# Altium PCB I2C_Shield.PcbDoc (part 1 of 2)
Units mm, origin at the board's own origin, x right, y up, seen from the top; angles counter-clockwise.
Board outline 57.58 x 53.85 mm, 2 copper layers (Top Layer, Bottom Layer); 35 components, 41 nets, 124 pads, 57 vias.
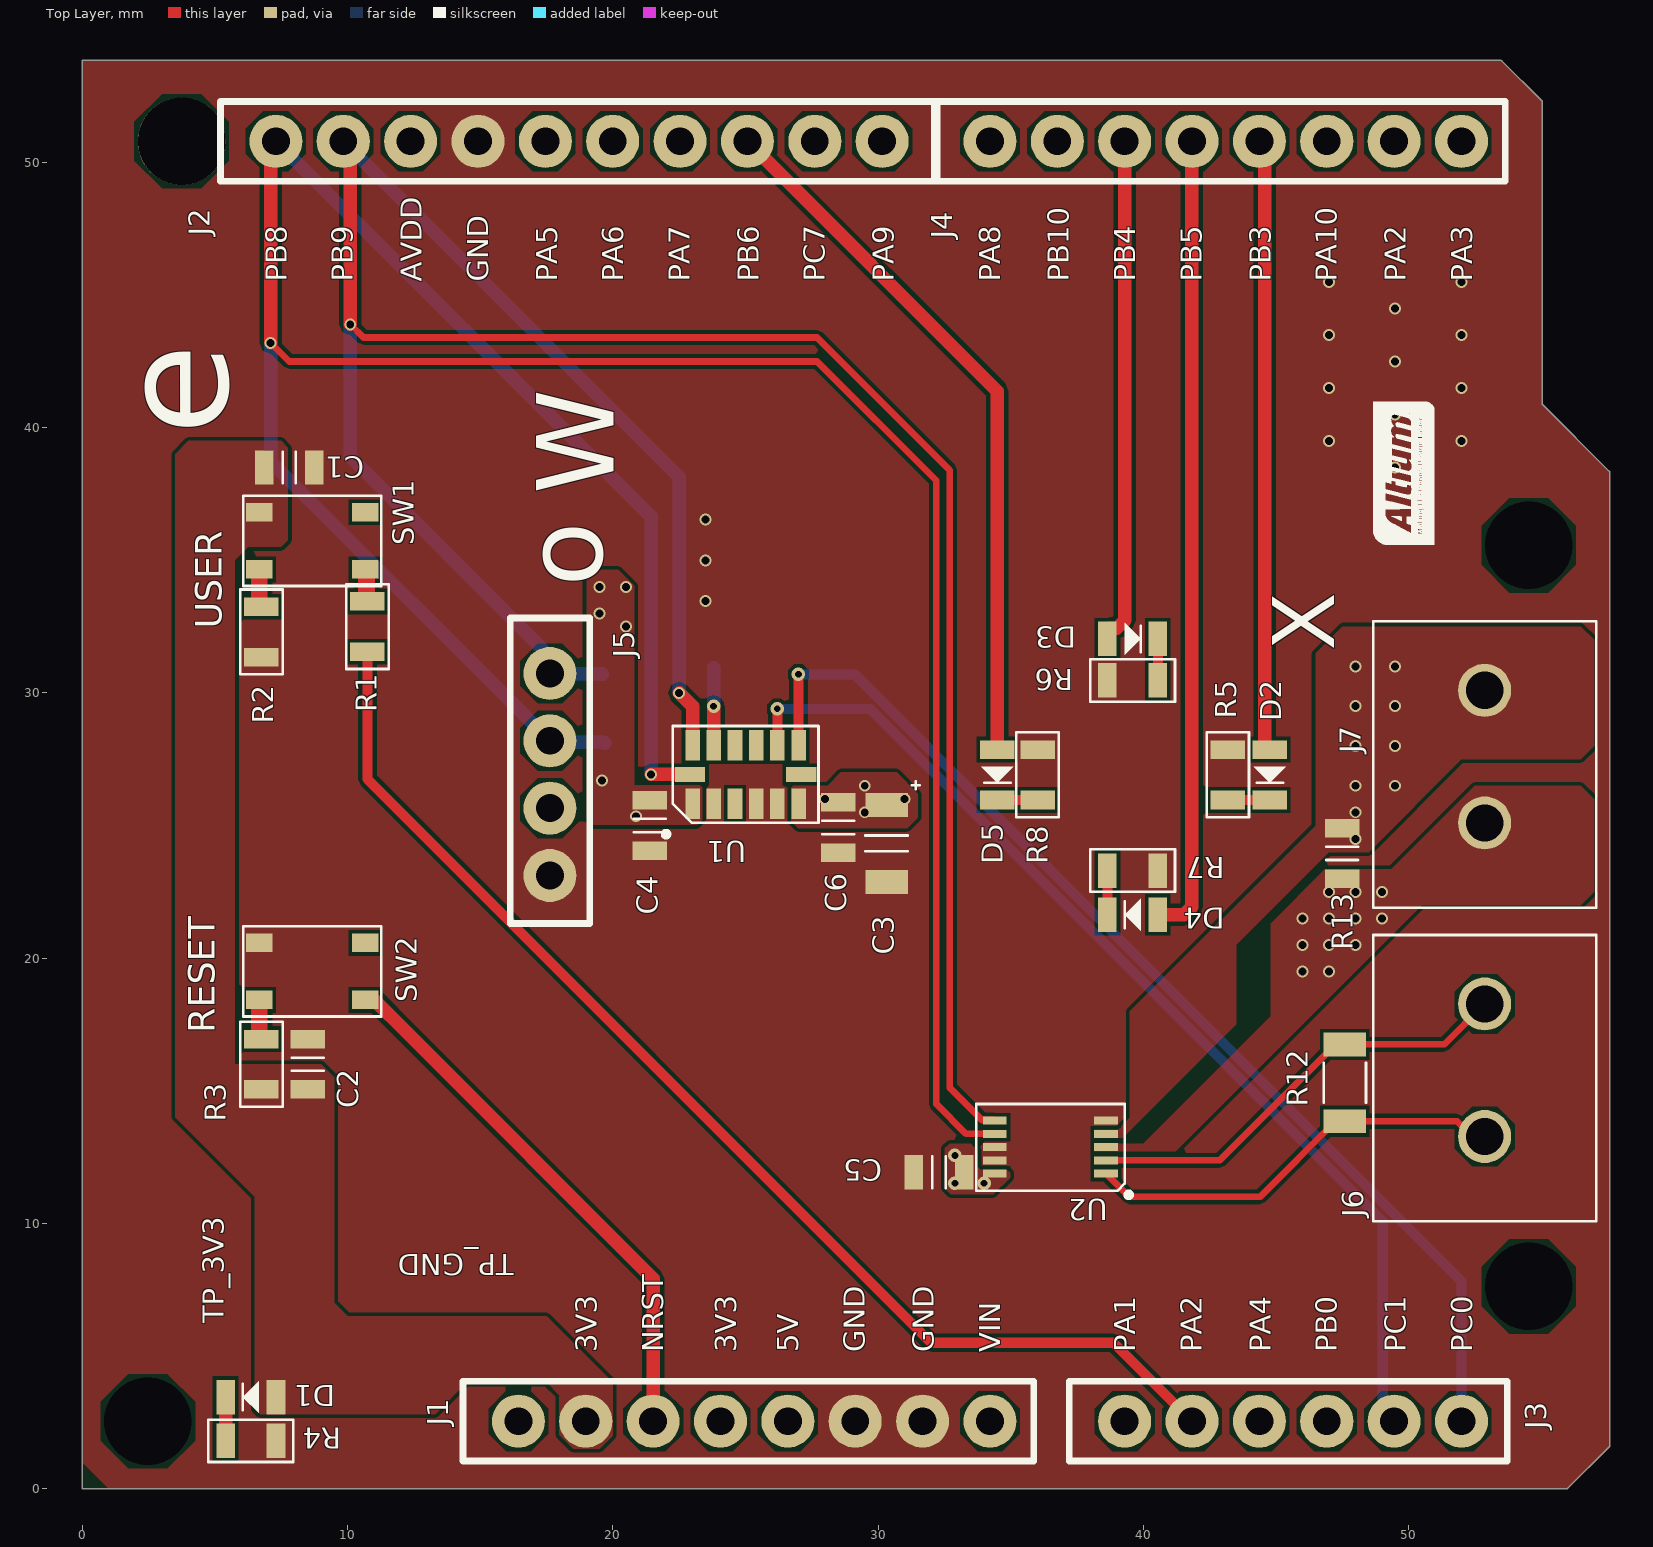
[diagram p0: Top Layer view]
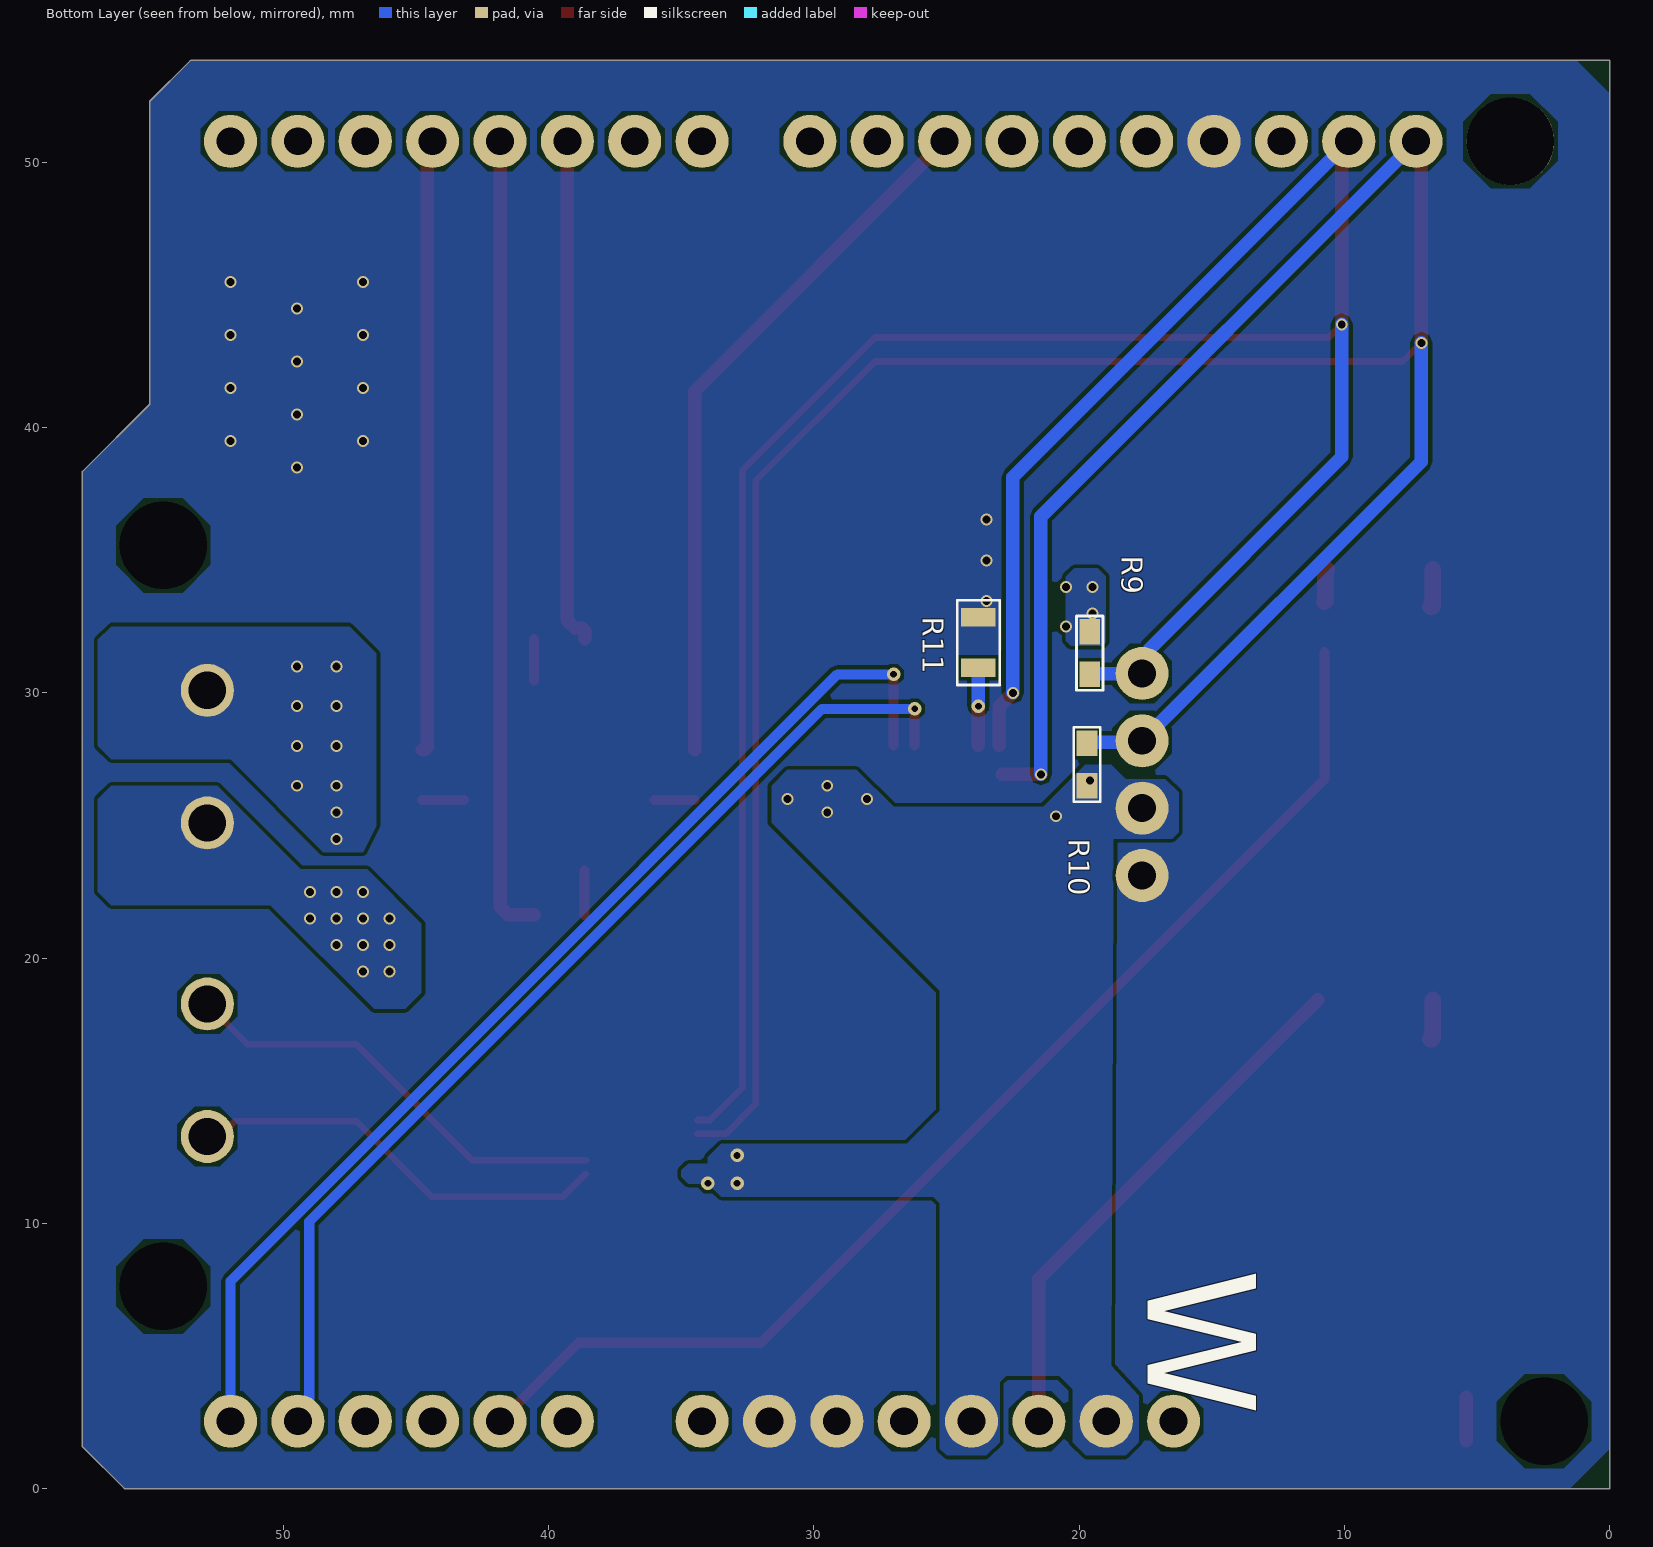
[diagram p1: Bottom Layer view, seen from below]
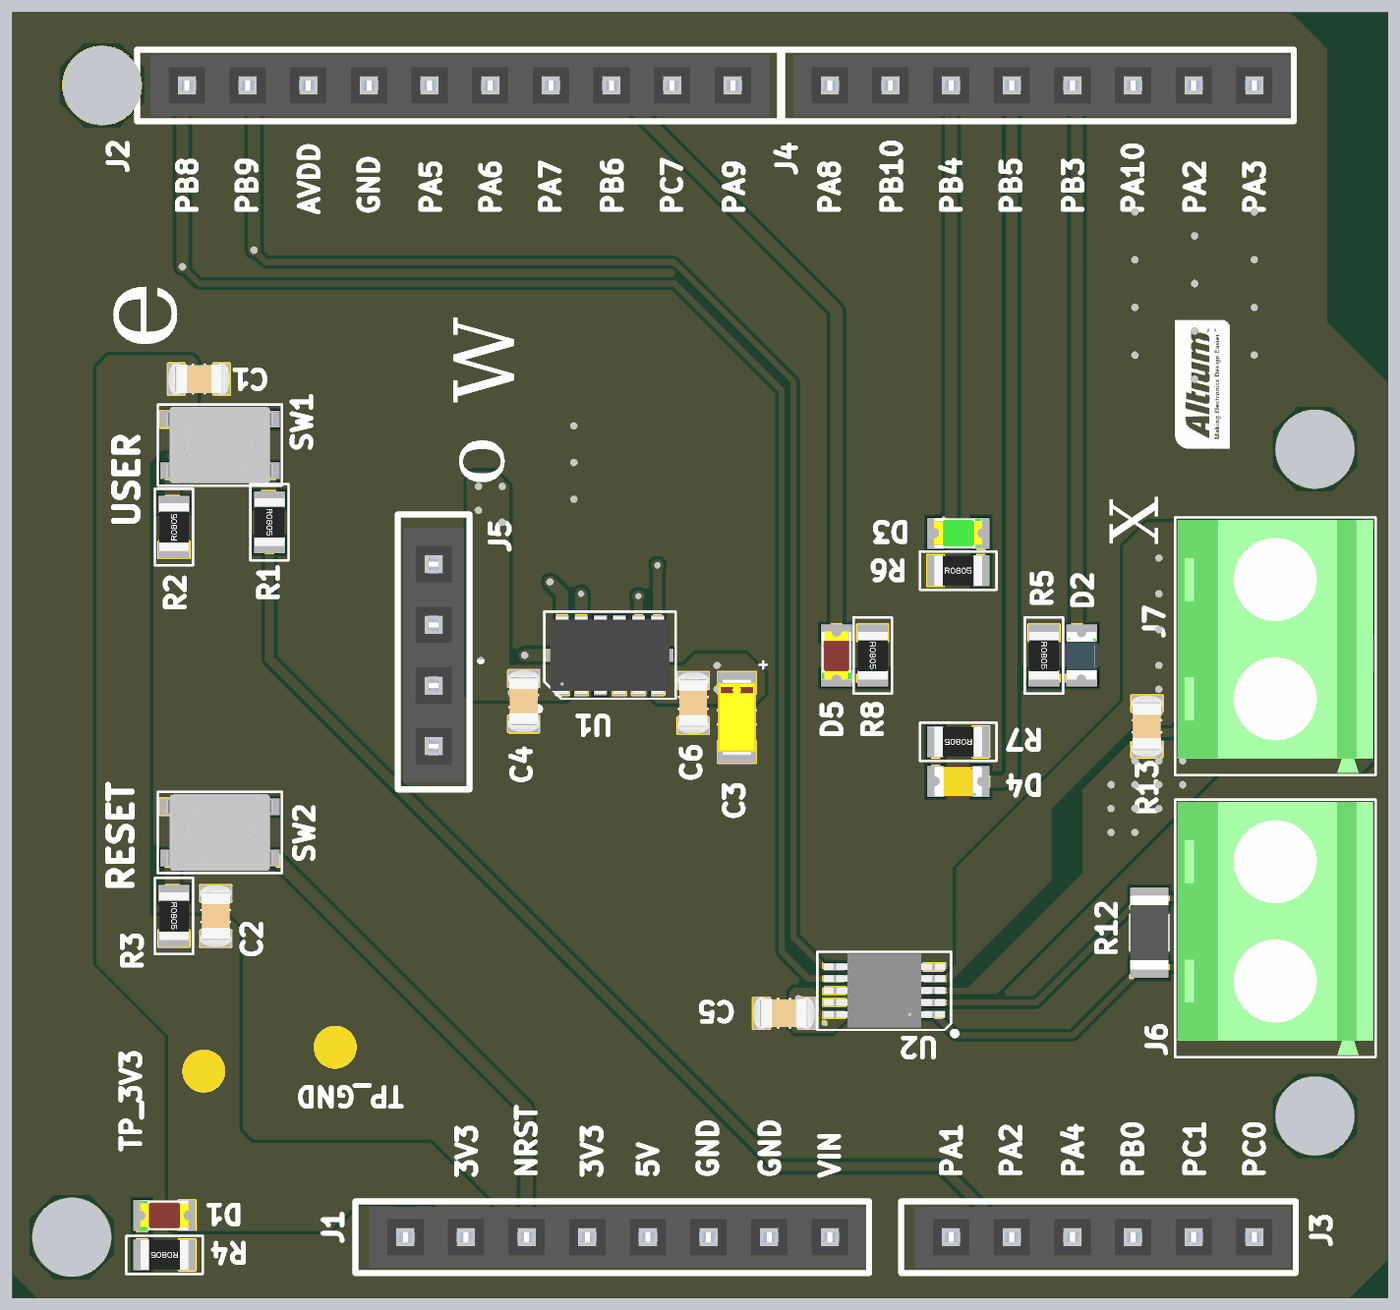
[diagram p2: 3D render of the assembled board from above, using the file's embedded part models]
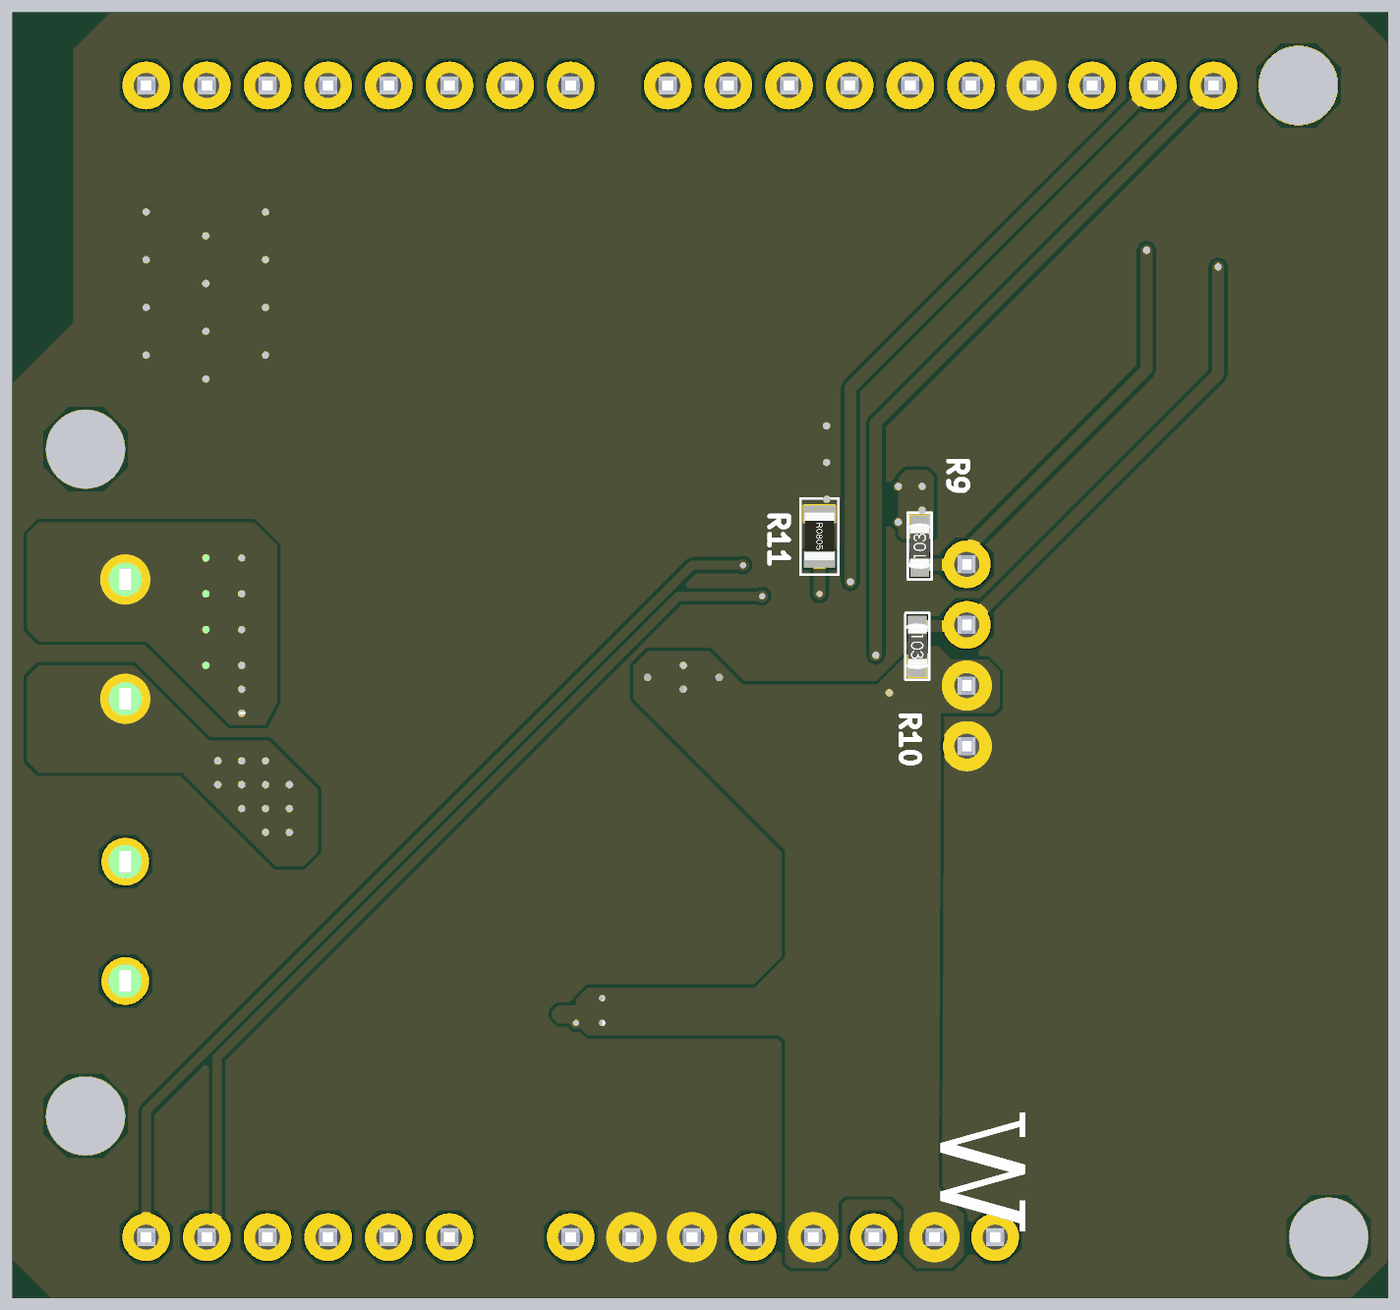
[diagram p3: 3D render of the assembled board from below, using the file's embedded part models]

## Layer stack, top to bottom
Top Solder: solder mask 0.0102, Solder Resist, Dk 3.5
Top Layer: signal copper 0.0356
Dielectric 1: dielectric 0.32, FR-4, Dk 4.8
Bottom Layer: signal copper 0.0356
Bottom Solder: solder mask 0.0102, Solder Resist, Dk 3.5

## Board outline
0,0 0,53.851 53.508,53.851 53.515,53.843 53.508,53.851 55.046,52.312 55.046,40.886 57.581,38.351 57.581,1.58 56.001,0

## Design rules (kind name [scope] priority, off if disabled: settings)
Clearance [All] p1: gap=0.127 ignorepadtopadclearanceinfootprint=FALSE except(0: Arc-Hole Track-Hole SMDPad-Hole THPad-Hole Via-Hole Fill-Hole Poly-Hole Region-Hole Text-Hole)
ComponentClearance [All] p1: gap=0.254 collisioncheckmode=3 verticalgap=-2.54 showdistances=FALSE
Height [All] p1: minheight=0 maxheight=100 prefheight=12.7
HoleSize [All] p1: absolutevalues=TRUE maxlimit=6.3 minlimit=0.2 maxpercent=80.000 minpercent=20.000
HoleToHoleClearance [All] p1: gap=0.6 allowstackedmicrovias=TRUE
MinimumSolderMaskSliver MinimumSolderMaskSliver_1 [All] p1: minsoldermaskwidth=0.095
MinimumSolderMaskSliver [All] p2: minsoldermaskwidth=0.1
PolygonConnect [All] p1: connectstyle=Relief reliefconductorwidth=0.254 reliefentries=4 polygonreliefangle="90 Angle" airgapwidth=0.254
RoutingVias [All] p1: holewidth=0.4 width=0.6 viastyle="Through Hole" minholewidth=0.2 minwidth=0.3 maxholewidth=6.2 maxwidth=6.3
SilkToSilkClearance [All] p1: silktosilkclearance=0.15
SilkToSolderMaskClearance [IsPad] p1: minsilkscreentomaskgap=0.15 clearancetoexposedcopper=TRUE
SolderMaskExpansion [All] p1: expansion=0.1 istentingtop=FALSE
Width [All] p1: maxlimit=1.27 minlimit=0.254 preferedwidth=0.508
23 further rules are at their usual default settings.

## Classes and differential pairs
component class Power_Management: C1 C2 C3 C4 C5 C6 D1 D2 D3 D4 D5 J5 J6 J7 R1 R2 R3 R4 R5 R6 R7 R8 R9 R10 R11 R12 R13 SW1 SW2 U1 U2
component class Controllers: J1 J2 J3 J4

## Components (designator, comment, footprint, x,y, rotation, side; value= is the part's Value field where it differs from the comment)
C1 "CL21B104KBCNNNC" CAP_0805 7.8,38.5 r180 top
C2 "CL21B104KBCNNNC" CAP_0805 8.5,16 r270 top
C3 "T491A106K010AT" CAP_1206_TANT 30.325,24.325 r270 top
C4 "CL21B104KBCNNNC" CAP_0805 21.4,25 r90 top
C5 "CL21B104KBCNNNC" CAP_0805 32.3,11.925 r0 top
C6 "CL21B104KBCNNNC" CAP_0805 28.5,24.926 r90 top
D1 "LH R974-LP-1" LED_RED_0805 6.35,3.45 r0 top
D2 "150080BS75000" LED_BLUE_0805 44.775,26.913 r90 top
D3 "LTST-C171GKT" LED_GREEN_0805 39.6,32.038 r180 top
D4 "LTST-C170KFKT" LED_ORANGE_0805 39.6,21.638 r0 top
D5 "LH R974-LP-1" LED_RED_0805 34.5,26.913 r90 top
J1 "PPTC081LFBN-RC" "8x1 Female Header 2.54mm" 25.33,2.54 r0 top locked
J2 "PPTC101LFBN-RC" "10x1 Female Header 2.54mm" 18.726,50.8 r0 top
J3 "PPTC061LFBN-RC" "6x1 Female Header 2.54mm" 45.65,2.54 r0 top
J4 "PPTC081LFBN-RC" "8x1 Female Header 2.54mm" 43.11,50.8 r0 top
J5 "PPTC041LFBN-RC" "4x1 Female Header 2.54mm" 17.627,26.925 r270 top
J6 "282836-2" TERMINAL 52.875,15.775 r270 top
J7 "282836-2" TERMINAL 52.875,27.6 r270 top
R1 "RC0805FR-07470RL" RES_0805 10.75,32.5 r270 top
R2 "RC0805JR-0710KL" RES_0805 6.75,32.3 r90 top
R3 "RC0805JR-0710KL" RES_0805 6.75,16 r270 top
R4 "RC0805FR-07470RL" RES_0805 6.35,1.8 r180 top
R5 "RC0805FR-07470RL" RES_0805 43.189,26.913 r270 top
R6 "RC0805FR-07470RL" RES_0805 39.6,30.47 r0 top
R7 "RC0805FR-07470RL" RES_0805 39.6,23.3 r180 top
R8 "RC0805FR-07470RL" RES_0805 36.017,26.913 r270 top
R9 "RC0603JR-074K7L" RES_0603 19.6,31.5 r90 bottom
R10 "RC0603JR-074K7L" RES_0603 19.7,27.3 r270 bottom
R11 "RC0805JR-0710KL" RES_0805 23.8,31.9 r270 bottom
R12 "RL1206FR-070R01L" RES_1206 47.6,15.3 r270 top
R13 "CC0805KRX7R9BB471" CAP_0805 47.5,23.95 r270 top
SW1 "PTS815 SJK 250 SMTR LFS" "BUTTON SMD" 8.671,35.734 r180 top locked
SW2 "PTS815 SJK 250 SMTR LFS" "BUTTON SMD" 8.671,19.5 r180 top locked
U1 "ADXL345BCCZ" 14-VFLGA 25.007,26.925 r90 top
U2 "LTC2990IMS#TRPBF" MSOP-10 36.5,12.875 r90 top

## Footprints (in the part's own frame and the unit in brackets; to place one, negate y for a bottom-side part, rotate by r counter-clockwise, add the part's x,y. Pads: shape width x height; smd on the part's side, far side on the other; paste and mask are expansions set on the pad)
"4x1 Female Header 2.54mm" [mm]
  round 2 hole 1.05 mask+0.05: 1(-3.81,0) 2(-1.27,0) 3(1.27,0) 4(3.81,0)
  silkscreen extent -5.9,-1.5 5.62,1.5, body extent -5.33,-1.27 5.33,1.27, height 8.51
"6x1 Female Header 2.54mm" [mm]
  round 2 hole 1.05 mask+0.05: 1(-6.35,0) 2(-3.81,0) 3(-1.27,0) 4(1.27,0) 5(3.81,0) 6(6.35,0)
  silkscreen extent -8.44,-1.5 8.08,1.5, body extent -7.87,-1.27 7.87,1.27, height 8.51
"8x1 Female Header 2.54mm" [mm]
  round 2 hole 1.05 mask+0.05: 1(-8.89,0) 2(-6.35,0) 3(-3.81,0) 4(-1.27,0) 5(1.27,0) 6(3.81,0) 7(6.35,0) 8(8.89,0)
  silkscreen extent -10.98,-1.5 10.54,1.5, body extent -10.41,-1.27 10.41,1.27, height 8.51
"10x1 Female Header 2.54mm" [mm] "Through Hole"
  round 2 hole 1.05 mask+0.05: 1(-11.43,0) 2(-8.89,0) 3(-6.35,0) 4(-3.81,0) 5(-1.27,0) 6(1.27,0) 7(3.81,0) 8(6.35,0) 9(8.89,0) 10(11.43,0)
  silkscreen extent -13.52,-1.5 13.5,1.5, body extent -12.95,-1.27 12.95,1.27, height 8.51
14-VFLGA [mm] "Surface Mount"
  rect 1.145x0.55 smd mask+0.05: 1(-1.097,2) 2(-1.097,1.2) 3(-1.097,0.4) 4(-1.097,-0.4) 5(-1.097,-1.2) 6(-1.097,-2) 8(1.098,-2) 9(1.098,-1.2) 10(1.098,-0.4) 11(1.098,0.4) 12(1.098,1.2) 13(1.098,2)
  rect 0.55x1.145 smd mask+0.05: 7(0,-2.097) 14(0,2.097)
  silkscreen extent -2.35,-2.75 1.83,3.1, body extent -1.63,-2.5 1.63,2.5, height 1.02
"BUTTON SMD" [mm] "4.2mm x 3.2mm"
  rect 1x0.7 smd mask+0.05: 1(-2,1.075) 2(2,1.075) 4(2,-1.075) ""(-2,-1.075)
  silkscreen extent -2.6,-1.7 2.6,1.7, body extent -2.25,-1.6 2.25,1.6
CAP_0805 [mm]
  rect 0.7x1.3 smd mask+0.05: 1(-0.95,0) 2(0.95,0)
  silkscreen extent -0.25,-0.6 0.25,0.6, body extent -1.3,-0.68 1.3,0.68, height 0.9
CAP_1206_TANT [mm]
  rect 0.9x1.6 smd mask+0.05: 1(-1.45,0) 2(1.45,0)
  silkscreen extent -2.35,-0.8 0.3,1.25, body extent -1.6,-0.8 1.6,0.8, height 1.8
LED_BLUE_0805 [mm]
  rect 0.7x1.3 smd mask+0.05: 1(-0.95,0) 2(0.95,0)
  silkscreen extent -0.3,-0.6 0.3,0.6, body extent -1.02,-0.62 0.98,0.64, height 0.8
LED_GREEN_0805 [mm]
  rect 0.7x1.3 smd mask+0.05: 1(-0.95,0) 2(0.95,0)
  silkscreen extent -0.3,-0.6 0.3,0.6, body extent -1.01,-0.63 1.01,0.62, height 1.1
LED_ORANGE_0805 [mm]
  rect 0.7x1.3 smd mask+0.05: 1(-0.95,0) 2(0.95,0)
  silkscreen extent -0.3,-0.6 0.3,0.6, body extent -1,-0.63 1,0.63, height 0.8
LED_RED_0805 [mm]
  rect 0.7x1.3 smd mask+0.05: 1(-0.95,0) 2(0.95,0)
  silkscreen extent -0.3,-0.6 0.3,0.6, body extent -1.01,-0.63 1.01,0.62, height 1.1
MSOP-10 [mm]
  rect 0.305x0.9 smd mask+0.05: 1(-1,-2.1) 2(-0.5,-2.1) 3(0,-2.1) 4(0.5,-2.1) 5(1,-2.1) 6(1,2.1) 7(0.5,2.1) 8(0,2.1) 9(-0.5,2.1) 10(-1,2.1)
  silkscreen extent -1.9,-3.05 1.63,2.8, body extent -1.55,-2.53 1.55,2.53, height 1.09
RES_0603 [mil]
  rect 38x31 smd mask+1.97: 1(-31.5,0) 2(31.5,0)
  silkscreen extent -55,-20 55,20, body extent -39,-19 39,20, height 17
RES_0805 [mm]
  rect 0.7x1.3 smd mask+0.05: 1(-0.95,0) 2(0.95,0)
  silkscreen extent -1.6,-0.8 1.6,0.8, body extent -1,-0.63 1,0.63, height 0.6
RES_1206 [mm]
  rect 0.9x1.6 smd mask+0.05: 1(-1.45,0) 2(1.45,0)
  silkscreen extent -0.75,-0.8 0.75,0.8, body extent -1.55,-0.8 1.55,0.8, height 0.65
TERMINAL [mm] "5MM"
  round 2 hole 1.4 mask+0.05: 1(-2.5,0) 2(2.5,0)
  silkscreen extent -5.1,-4.2 5.7,4.2, body extent -5,-4.1 5.6,4.1, height 10

## Part data
C1 C2 C4 C5 C6: library part "CAP CER 100nF 0805", "CAP CER 100nF %10 0805", Capacitance=100nF, Case Code (Metric)=2012, Case Code (Imperial)=0805, Dielectric=X7R, Manufacturer=Samsung, Max Operating Temperature=125°C, Min Operating Temperature=-55°C, Supplier Part Number 1=1276-1003-1-ND, Tolerance=10%, Voltage=50V, Case/Package=0805, Category="Ceramic Capacitors", ComponentLink1Description=https://datasheet.ciiva.com/25710/cl21b104kbcnnnc-25710182.pdf?src-supplier=Digi-Key, ComponentLink1URL=https://datasheet.ciiva.com/25710/cl21b104kbcnnnc-25710182.pdf?src-supplier=Digi-Key, ComponentLink2Description=https://datasheet.ciiva.com/29199/454152-da-01-en-vs-kondensator-0805-29199814.pdf?src-supplier=Conrad, ComponentLink2URL=https://datasheet.ciiva.com/29199/454152-da-01-en-vs-kondensator-0805-29199814.pdf?src-supplier=Conrad, Construction=Flat, Contact Plating=Tin, Depth=1.25mm, Designed by=BERK, Height=0.85mm, Lead Free="Lead Free", Length=2mm, Manufacturer Part Number=CL21B104KBCNNNC, Material=Ceramic, Mount="Surface Mount", Packaging="Tape and Reel", Pricing 1="1=0,10000, 10=0,04700, 50=0,02560, 100=0,02090, 500=0,01494, 1000=0,01174 (USD)", Radiation Hardening=No, RoHS=Yes, RoHS Compliant=Yes, Series=CL, Stock 1=3371502, Supplier 1=Digi-Key, Thickness=0.037inch, Voltage Rating=50V, Voltage Rating (DC)=50V, Width=0.049inch
C3: library part "CAP TANT 10uF 1206", "Cap Tant Solid 10uF 10V A CASE 10% (3.2 X 1.6 X 1.6mm) SMD 3216-18 4 Ohm 125 C T/R", Capacitance=10uF, Case Code (Metric)=3216, Case Code (Imperial)=1206, Dielectric Material=Tantalum, ESR (Equivalent Series Resistance)=4R, Leakage Current=1uA, Manufacturer=KEMET, Max Operating Temperature=125°C, Min Operating Temperature=-55°C, Package Quantity=1, Ripple Current=137mA, Supplier Part Number 1=399-3684-1-ND, Tolerance=10%, Voltage=10V, Case/Package=1206, Category="Tantalum Capacitors", ComponentLink1Description=https://datasheet.ciiva.com/7668/1732743-7668006.pdf?src-supplier=Element14, ComponentLink1URL=https://datasheet.ciiva.com/7668/1732743-7668006.pdf?src-supplier=Element14, ComponentLink2Description=https://datasheet.ciiva.com/27052/1573249-27052559.pdf?src-supplier=Jameco, ComponentLink2URL=https://datasheet.ciiva.com/27052/1573249-27052559.pdf?src-supplier=Jameco, ComponentLink3Description=https://datasheet.ciiva.com/257/kem-t2005-t491-257584.pdf?src-supplier=Digikey, ComponentLink3URL=https://datasheet.ciiva.com/257/kem-t2005-t491-257584.pdf?src-supplier=Digikey, ComponentLink4Description=https://datasheet.ciiva.com/11793/0900766b80718482-11793106.pdf?src-supplier=Rs, ComponentLink4URL=https://datasheet.ciiva.com/11793/0900766b80718482-11793106.pdf?src-supplier=Rs, ComponentLink5Description=https://datasheet.ciiva.com/7668/kem-t2005-t491-7668139.pdf?src-supplier=Element14, ComponentLink5URL=https://datasheet.ciiva.com/7668/kem-t2005-t491-7668139.pdf?src-supplier=Element14, ComponentLink6Description=https://datasheet.ciiva.com/7668/1854511-7668007.pdf?src-supplier=Element14, ComponentLink6URL=https://datasheet.ciiva.com/7668/1854511-7668007.pdf?src-supplier=Element14, ComponentLink7Description=https://datasheet.ciiva.com/7668/1446014-7668008.pdf?src-supplier=Element14, ComponentLink7URL=https://datasheet.ciiva.com/7668/1446014-7668008.pdf?src-supplier=Element14, ComponentLink8Description=https://datasheet.ciiva.com/7668/1854511-7668005.pdf?src-supplier=Element14, ComponentLink8URL=https://datasheet.ciiva.com/7668/1854511-7668005.pdf?src-supplier=Element14, ComponentLink9Description=https://datasheet.ciiva.com/257/kem-t2005-t491-257585.pdf?src-supplier=Digikey, ComponentLink9URL=https://datasheet.ciiva.com/257/kem-t2005-t491-257585.pdf?src-supplier=Digikey, ComponentLink10Description=https://datasheet.ciiva.com/257/kem-t2005-t491-257586.pdf?src-supplier=Digikey, ComponentLink10URL=https://datasheet.ciiva.com/257/kem-t2005-t491-257586.pdf?src-supplier=Digikey, ComponentLink11Description=https://datasheet.ciiva.com/14586/70095774-14586699.pdf?src-supplier=Allied+Electronics, ComponentLink11URL=https://datasheet.ciiva.com/14586/70095774-14586699.pdf?src-supplier=Allied+Electronics, ComponentLink12Description=https://datasheet.ciiva.com/14596/70095774-14596972.pdf?src-supplier=Allied+Electronics, ComponentLink12URL=https://datasheet.ciiva.com/14596/70095774-14596972.pdf?src-supplier=Allied+Electronics, ComponentLink13Description=https://datasheet.ciiva.com/12882/kem-t2005-t491-12882826.pdf?src-supplier=Mouser, ComponentLink13URL=https://datasheet.ciiva.com/12882/kem-t2005-t491-12882826.pdf?src-supplier=Mouser, ComponentLink14Description=https://datasheet.ciiva.com/29244/458293-da-01-en-kondensator-10uf-3216-10pr-10v-85c-29244583.pdf?src-supplier=Conrad, ComponentLink14URL=https://datasheet.ciiva.com/29244/458293-da-01-en-kondensator-10uf-3216-10pr-10v-85c-29244583.pdf?src-supplier=Conrad, Construction=Flat, Depth=1.6mm, Designed by="Aslı Kurt", Dissipation Factor=6%, Features="General Purpose", Height=1.6mm, Height - Seated (Max)=0.071inch, Lead Free=5697LeadFree, Length=3.2mm, Manufacturer Part Number=T491A106K010AT, Mount="Surface Mount,PCB", Packaging="Tape and Reel", Polarity=Polar, Pricing 1="1=0,32, 10=0,209, 50=0,154, 100=0,1255, 500=0,09904, 1000=0,08364 (USD)", Reach SVHC Compliant=No, RoHS=Yes, RoHS Compliant=Yes, Series=T491, Size=1.6mm, Stock 1=1419669, Supplier 1=Digikey, Termination=SMD/SMT, Voltage Rating=10V, Voltage Rating (DC)=10V, Width=0.063inch
D1 D5: library part "LED RED 0805", "LED Uni-Color Hyper Red 660nm 2-Pin Chip 0805(2012Metric) T/R", Case Code (Metric)=2012, Case Code (Imperial)=0805, Color=Red, Forward Current=30mA, Forward Voltage=1.8V, Lens Color=White, Manufacturer="Osram Opto", Max Operating Temperature=85°C, Min Operating Temperature=-30°C, Package Quantity=1, Reverse Voltage=5V, Supplier Part Number 1=475-1415-1-ND, Test Current=20mA, Case/Package=0805, Category=LEDs, ComponentLink1Description=http://www.jameco.com/Jameco/Products/ProdDS/2085634.pdf?src-supplier=Jameco, ComponentLink1URL=http://www.jameco.com/Jameco/Products/ProdDS/2085634.pdf?src-supplier=Jameco, ComponentLink2Description=http://components.arrow.com/part/dataview/0323_01825492?src-supplier=Arrow+Europe, ComponentLink2URL=http://components.arrow.com/part/dataview/0323_01825492?src-supplier=Arrow+Europe, ComponentLink3Description=https://dammedia.osram.info/media/resource/hires/osram-dam-2493888/LH%20R974.pdf?src-supplier=Digi-Key, ComponentLink3URL=https://dammedia.osram.info/media/resource/hires/osram-dam-2493888/LH%20R974.pdf?src-supplier=Digi-Key, ComponentLink4Description=http://www.mouser.com/ds/2/311/LH%20R974%20-%20CHIPLED%200805-318659.pdf?src-supplier=Mouser, ComponentLink4URL=http://www.mouser.com/ds/2/311/LH%20R974%20-%20CHIPLED%200805-318659.pdf?src-supplier=Mouser, ComponentLink5Description=https://www.verical.com/server-webapp/html/getDatasheet?partID=258950&src-supplier=Verical, ComponentLink5URL=https://www.verical.com/server-webapp/html/getDatasheet?partID=258950&src-supplier=Verical, ComponentLink6Description=http://components.arrow.com/part/dataview/41971690S1077610N9133?src-supplier=Arrow+Electronics, ComponentLink6URL=http://components.arrow.com/part/dataview/41971690S1077610N9133?src-supplier=Arrow+Electronics, ComponentLink7Description=http://components.arrow.com/part/dataview/41971690S6190115N2128?src-supplier=Arrow+Electronics, ComponentLink7URL=http://components.arrow.com/part/dataview/41971690S6190115N2128?src-supplier=Arrow+Electronics, Depth=1.35mm, Designed by=BERK, Dominant Wavelength=645nm, Length=2.1mm, Lens Size=1.25mm, Lens Style=Diffused,Flat,Colorless, Lens Transparency=Diffused, Luminous Flux=0.17lm, Luminous Intensity=71mcd, Manufacturer Part Number="LH R974-LP-1", Mount="Surface Mount", Number of Elements=1, Number of Pins=2, Packaging="Tape and Reel", Pricing 1="1=0,26000, 10=0,13900, 100=0,06480, 500=0,05978, 1000=0,04683, 2000=0,04584 (USD)", Radiation Hardening=No, RoHS=Yes, RoHS Compliant=Yes, Series=CHipLED, Stock 1=35632, Supplier 1=Digi-Key, Viewing Angle=160°, Width=1.25mm, Illumination Color=Red
D2: library part "LED BLUE 0805", "LED BLUE CLEAR 0805 SMD", Case Code (Metric)=2012, Case Code (Imperial)=0805, Color=Blue, Forward Current=30mA, Forward Voltage=3.2V, Lens Color=Colorless, Manufacturer="Wurth Electronics", Max Operating Temperature=85°C, Max Reverse Voltage (DC)=5V, Min Operating Temperature=-40°C, Package Quantity=1, Power Dissipation=105mW, Supplier Part Number 1=732-4982-1-ND, Test Current=20mA, Case/Package=0805, Category=LEDs, ComponentLink1Description=https://datasheet.ciiva.com/22656/1740214-22656954.pdf?src-supplier=Element14, ComponentLink1URL=https://datasheet.ciiva.com/22656/1740214-22656954.pdf?src-supplier=Element14, ComponentLink2Description=https://datasheet.ciiva.com/23843/150080bs75000-23843251.pdf?src-supplier=Newark, ComponentLink2URL=https://datasheet.ciiva.com/23843/150080bs75000-23843251.pdf?src-supplier=Newark, ComponentLink3Description=https://datasheet.ciiva.com/29279/759433-da-01-en-chipled-0805-w-kl-blau-150080bs75000-29279203.pdf?src-supplier=Conrad, ComponentLink3URL=https://datasheet.ciiva.com/29279/759433-da-01-en-chipled-0805-w-kl-blau-150080bs75000-29279203.pdf?src-supplier=Conrad, ComponentLink4Description=https://datasheet.ciiva.com/29562/150080bs75000-29562923.pdf?src-supplier=Digikey, ComponentLink4URL=https://datasheet.ciiva.com/29562/150080bs75000-29562923.pdf?src-supplier=Digikey, ComponentLink5Description=https://datasheet.ciiva.com/29562/150080bs75000-29562922.pdf?src-supplier=Digikey, ComponentLink5URL=https://datasheet.ciiva.com/29562/150080bs75000-29562922.pdf?src-supplier=Digikey, Designed by="Aslı Kurt", Dominant Wavelength=470nm, Height=0.8mm, Lead Free="Lead Free", Length=2mm, Lens Size=1.25mm, Lens Style=Clear,Flat,Rectangular, Lens Transparency=Clear, Luminous Intensity=145mcd, Manufacturer Part Number=150080BS75000, Mount="Surface Mount", Packaging="Cut Tape", Pricing 1="1=0,18, 50=0,176, 100=0,151, 500=0,131, 4000=0,131 (USD)", Reach SVHC Compliant=Unknown, Reverse Voltage=5V, RoHS=Yes, RoHS Compliant=Yes, Series=WL-SMCW, Stock 1=111917, Supplier 1=Digikey, Viewing Angle=140°, Wavelength=470nm, Width=1.25mm
D3: library part "LED GREEN 0805", "Green 0805 130 º Min 5 mcd Typical 12 mcd Water Clear Lens SMT LED", Case Code (Metric)=2012, Case Code (Imperial)=0805, Color=Green, Forward Current=30mA, Forward Voltage=2.1V, Lens Color=Colorless, Manufacturer="Vishay Lite-On", Max Operating Temperature=85°C, Min Operating Temperature=-55°C, Package Quantity=1, Power Dissipation=100mW, Reverse Voltage=5V, Supplier Part Number 1=160-1423-1-ND, Test Current=10mA, Case/Package=0805, Category=LEDs, ComponentLink1Description=https://datasheet.ciiva.com/2110/ltst-c171gkt-2110000.pdf?src-supplier=Digi-Key, ComponentLink1URL=https://datasheet.ciiva.com/2110/ltst-c171gkt-2110000.pdf?src-supplier=Digi-Key, ComponentLink2Description=https://datasheet.ciiva.com/11773/0900766b80dc0296-11773991.pdf?src-supplier=RSComponents, ComponentLink2URL=https://datasheet.ciiva.com/11773/0900766b80dc0296-11773991.pdf?src-supplier=RSComponents, ComponentLink3Description=https://datasheet.ciiva.com/12400/lite-on-ltst-c171gkt-190133-12400647.pdf?src-supplier=Mouser, ComponentLink3URL=https://datasheet.ciiva.com/12400/lite-on-ltst-c171gkt-190133-12400647.pdf?src-supplier=Mouser, ComponentLink4Description=https://datasheet.ciiva.com/2110/ltst-c171gkt-2110001.pdf?src-supplier=Digi-Key, ComponentLink4URL=https://datasheet.ciiva.com/2110/ltst-c171gkt-2110001.pdf?src-supplier=Digi-Key, ComponentLink5Description=https://datasheet.ciiva.com/2110/ltst-c171gkt-2110002.pdf?src-supplier=Digi-Key, ComponentLink5URL=https://datasheet.ciiva.com/2110/ltst-c171gkt-2110002.pdf?src-supplier=Digi-Key, ComponentLink6Description=https://datasheet.ciiva.com/16396/ltst-c171gkt-16396549.pdf?src-supplier=Future+Electronics, ComponentLink6URL=https://datasheet.ciiva.com/16396/ltst-c171gkt-16396549.pdf?src-supplier=Future+Electronics, Depth=1.25mm, Designed by=BERK, Dominant Wavelength=569nm, Height=0.8mm, Lead Free="Lead Free", Length=2mm, Lens Style=Diffused,Colorless,Rectangular,Clear, Lens Transparency=Clear, Luminous Intensity=12mcd, Manufacturer Part Number=LTST-C171GKT, Mount="Surface Mount", Number of Elements=1, Number of LEDs=1, Number of Pins=2, Packaging="Tape and Reel", Power Rating=100mW, Pricing 1="1=0,26000, 10=0,14100, 100=0,06560, 500=0,06060, 1000=0,04747 (USD)", Radiation Hardening=No, RoHS=Yes, RoHS Compliant=Yes, Series="CHIPLED 0805", Stock 1=159023, Supplier 1=Digi-Key, Viewing Angle=130°, Wavelength=585nm, Width=1.25mm, Illumination Color=Green
D4: library part "LED ORANGE 0805", "LED Uni-Color Orange 611nm 2-Pin Chip LED T/R / LED ORANGE CLEAR 0805 SMD", Case Code (Metric)=2012, Case Code (Imperial)=0805, Color=Orange, Forward Current=30mA, Forward Voltage=2V, Lens Color=Colorless, Manufacturer="Vishay Lite-On", Max Operating Temperature=85°C, Min Operating Temperature=-55°C, Package Quantity=1, Power Dissipation=75mW, Reverse Voltage=5V, Supplier Part Number 1=160-1413-1-ND, Test Current=20mA, Case/Package=0805, Category=LEDs, ComponentLink1Description=https://datasheet.ciiva.com/12403/lite-on-ltst-c170kfkt-187690-12403821.pdf?src-supplier=Mouser, ComponentLink1URL=https://datasheet.ciiva.com/12403/lite-on-ltst-c170kfkt-187690-12403821.pdf?src-supplier=Mouser, ComponentLink2Description=https://datasheet.ciiva.com/11773/0900766b80dc0279-11773662.pdf?src-supplier=Rs, ComponentLink2URL=https://datasheet.ciiva.com/11773/0900766b80dc0279-11773662.pdf?src-supplier=Rs, ComponentLink3Description=https://datasheet.ciiva.com/15117/getdatasheetpartid-158266-15117926.pdf?src-supplier=Verical, ComponentLink3URL=https://datasheet.ciiva.com/15117/getdatasheetpartid-158266-15117926.pdf?src-supplier=Verical, ComponentLink4Description=https://datasheet.ciiva.com/16427/ltst-c170kfkt-16427484.pdf?src-supplier=Future+Electronics, ComponentLink4URL=https://datasheet.ciiva.com/16427/ltst-c170kfkt-16427484.pdf?src-supplier=Future+Electronics, ComponentLink5Description=https://datasheet.ciiva.com/2110/s-110-ltst-c170kfkt-2110076.pdf?src-supplier=Digikey, ComponentLink5URL=https://datasheet.ciiva.com/2110/s-110-ltst-c170kfkt-2110076.pdf?src-supplier=Digikey, ComponentLink6Description=https://datasheet.ciiva.com/2110/s-110-ltst-c170kfkt-2110075.pdf?src-supplier=Digikey, ComponentLink6URL=https://datasheet.ciiva.com/2110/s-110-ltst-c170kfkt-2110075.pdf?src-supplier=Digikey, ComponentLink7Description=https://datasheet.ciiva.com/2110/s-110-ltst-c170kfkt-2110077.pdf?src-supplier=Digikey, ComponentLink7URL=https://datasheet.ciiva.com/2110/s-110-ltst-c170kfkt-2110077.pdf?src-supplier=Digikey, Depth=1.6mm, Designed by="Aslı Kurt", Dominant Wavelength=605nm, Height=1.1mm, Lead Free="Lead Free", Length=3.2mm, Lens Style=Diffused,Colorless,Rectangular,Clear, Lens Transparency=Clear, Luminous Intensity=60mcd, Manufacturer Part Number=LTST-C170KFKT, Mount="Surface Mount", Number of Elements=1, Number of LEDs=1, Number of Pins=2, Packaging="Tape and Reel", Power Rating=75mW, Pricing 1="1=0,23, 10=0,127, 100=0,0762, 500=0,05646, 1000=0,05041 (USD)", Radiation Hardening=No, RoHS=Yes, RoHS Compliant=Yes, Stock 1=367568, Supplier 1=Digikey, Viewing Angle=130°, Wavelength=611nm, Width=1.25mm, Illumination Color=Orange
J1 J4: library part "8x1 Female Header 2.54mm", "Female, 8C, Straight, .100\"CC; 3.20mm Tail, No Mt. 100u\" Tin; PBT, Phos Bronze, 105 C", Manufacturer=Sullins, Supplier Part Number 1=S7006-ND, Category=Connectors, ComponentLink1Description=https://media.digikey.com/pdf/Data%20Sheets/Sullins%20PDFs/Female_Headers.100_DS.pdf?src-supplier=Digikey, ComponentLink1URL=https://media.digikey.com/pdf/Data%20Sheets/Sullins%20PDFs/Female_Headers.100_DS.pdf?src-supplier=Digikey, ComponentLink2Description=https://datasheet.octopart.com/PPTC081LFBN-RC-Sullins-datasheet-41308905.pdf?src-supplier=Future+Electronics, ComponentLink2URL=https://datasheet.octopart.com/PPTC081LFBN-RC-Sullins-datasheet-41308905.pdf?src-supplier=Future+Electronics, ComponentLink3Description=http://www.sullinscorp.com/catalogs/78_Page80-81_HEADER_.100_2.54mm_FEMALE.pdf?src-supplier=Future+Electronics, ComponentLink3URL=http://www.sullinscorp.com/catalogs/78_Page80-81_HEADER_.100_2.54mm_FEMALE.pdf?src-supplier=Future+Electronics, Contact Material=150ConductorMaterial, Designed by="Aslı Kurt", Height=8.5mm, Housing Material=4239ConductorMaterial, Lead Free=5697LeadFree, Length=20.8mm, Manufacturer Part Number=PPTC081LFBN-RC, Pricing 1="1=0,66, 10=0,571, 400=0,42998, 800=0,36855, 1200=0,33783, 5200=0,29689, 10000=0,2925 (USD)", RoHS=Yes, Stock 1=14321, Supplier 1=Digikey, Width=2.5mm
J2: library part "10x1 Female Header 2.54mm", "10 Position Single Row 2.54 mm Pitch Vertical Through Hole Socket Header", Manufacturer=Sullins, Supplier Part Number 1=S7008-ND, Category=Connectors, ComponentLink1Description=https://media.digikey.com/pdf/Data%20Sheets/Sullins%20PDFs/Female_Headers.100_DS.pdf?src-supplier=Digikey, ComponentLink1URL=https://media.digikey.com/pdf/Data%20Sheets/Sullins%20PDFs/Female_Headers.100_DS.pdf?src-supplier=Digikey, Designed by="Aslı Kurt", Manufacturer Part Number=PPTC101LFBN-RC, Pricing 1="1=0,66, 10=0,557, 320=0,455, 640=0,4095, 960=0,364, 5120=0,325 (USD)", RoHS=Yes, Stock 1=8769, Supplier 1=Digikey
J3: library part "6x1 Female Header 2.54mm", "Female, 6 C, Straight, .100\"CC; 3.20mm Tail, No Mt. 100u\" Tin; PBT, Phos Bronze, 105 C", Manufacturer=Sullins, Supplier Part Number 1=S7004-ND, Category=Connectors, ComponentLink1Description=https://media.digikey.com/pdf/Data%20Sheets/Sullins%20PDFs/Female_Headers.100_DS.pdf?src-supplier=Digikey, ComponentLink1URL=https://media.digikey.com/pdf/Data%20Sheets/Sullins%20PDFs/Female_Headers.100_DS.pdf?src-supplier=Digikey, ComponentLink2Description=https://datasheet.octopart.com/PPTC061LFBN-RC-Sullins-datasheet-41308905.pdf?src-supplier=Future+Electronics, ComponentLink2URL=https://datasheet.octopart.com/PPTC061LFBN-RC-Sullins-datasheet-41308905.pdf?src-supplier=Future+Electronics, ComponentLink3Description=http://www.sullinscorp.com/catalogs/78_Page80-81_HEADER_.100_2.54mm_FEMALE.pdf?src-supplier=Future+Electronics, ComponentLink3URL=http://www.sullinscorp.com/catalogs/78_Page80-81_HEADER_.100_2.54mm_FEMALE.pdf?src-supplier=Future+Electronics, Designed by="Aslı Kurt", Manufacturer Part Number=PPTC061LFBN-RC, Pricing 1="1=0,52, 10=0,454, 80=0,37463, 440=0,32577, 1000=0,26877, 5000=0,23619, 10000=0,2327 (USD)", RoHS=Yes, Stock 1=8306, Supplier 1=Digikey
J5: library part "4x1 Female Header 2.54mm", "CONN HEADER FEMALE 4POS .1 TIN", Manufacturer=Sullins, Supplier Part Number 1=S7002-ND, Category=Connectors, ComponentLink1Description=https://media.digikey.com/pdf/Data%20Sheets/Sullins%20PDFs/Female_Headers.100_DS.pdf?src-supplier=Digikey, ComponentLink1URL=https://media.digikey.com/pdf/Data%20Sheets/Sullins%20PDFs/Female_Headers.100_DS.pdf?src-supplier=Digikey, ComponentLink2Description=http://www.sullinscorp.com/catalogs/78_Page80-81_HEADER_.100_2.54mm_FEMALE.pdf?src-supplier=Future+Electronics, ComponentLink2URL=http://www.sullinscorp.com/catalogs/78_Page80-81_HEADER_.100_2.54mm_FEMALE.pdf?src-supplier=Future+Electronics, ComponentLink3Description=https://datasheet.octopart.com/PPTC041LFBN-RC-Sullins-datasheet-41308905.pdf?src-supplier=Future+Electronics, ComponentLink3URL=https://datasheet.octopart.com/PPTC041LFBN-RC-Sullins-datasheet-41308905.pdf?src-supplier=Future+Electronics, Designed by="Aslı Kurt", Manufacturer Part Number=PPTC041LFBN-RC, Pricing 1="1=0,55, 10=0,415, 100=0,3181, 500=0,26578, 1000=0,24659, 5000=0,20864, 10000=0,2041 (USD)", RoHS=Yes, Stock 1=27218, Supplier 1=Digikey
J6 J7: library part "2x1 TERMINAL 5mm", "Connector, Terminal Block; Wire Receptacle; 2 Pos.; 16-30 AWG; 0.197 in. CL; Sid", Color=Green, Current=13.5A, Flammability Rating="UL94 V-0", Manufacturer="TE Connectivity", Max Operating Temperature=105°C, Max Supply Voltage (AC)=300V, Min Operating Temperature=-40°C, Package Quantity=300, Supplier Part Number 1=A98076-ND, Voltage Rating (DC)=250V, Approvals=UL, Category="Terminal Blocks", Closed End="No (Without)", ComponentLink1Description=https://datasheet.ciiva.com/7628/1731782-7628513.pdf?src-supplier=Element14, ComponentLink1URL=https://datasheet.ciiva.com/7628/1731782-7628513.pdf?src-supplier=Element14, ComponentLink2Description=https://datasheet.ciiva.com/16393/282836-2-16393382.pdf?src-supplier=Future+Electronics, ComponentLink2URL=https://datasheet.ciiva.com/16393/282836-2-16393382.pdf?src-supplier=Future+Electronics, ComponentLink3Description=https://datasheet.ciiva.com/15169/getdatasheetpartid-155855-15169553.pdf?src-supplier=Verical, ComponentLink3URL=https://datasheet.ciiva.com/15169/getdatasheetpartid-155855-15169553.pdf?src-supplier=Verical, ComponentLink4Description=https://datasheet.ciiva.com/11757/0900766b8002dc8a-11757385.pdf?src-supplier=Rs, ComponentLink4URL=https://datasheet.ciiva.com/11757/0900766b8002dc8a-11757385.pdf?src-supplier=Rs, ComponentLink5Description=https://datasheet.ciiva.com/823/eng-cd-282836-h10-823437.pdf?src-supplier=Digikey, ComponentLink5URL=https://datasheet.ciiva.com/823/eng-cd-282836-h10-823437.pdf?src-supplier=Digikey, ComponentLink6Description=https://datasheet.ciiva.com/3141/eng-cs-1308389-eurostyle-terminal-blocks-0607-3141118.pdf?src-supplier=Avnet, ComponentLink6URL=https://datasheet.ciiva.com/3141/eng-cs-1308389-eurostyle-terminal-blocks-0607-3141118.pdf?src-supplier=Avnet, ComponentLink7Description=https://datasheet.ciiva.com/30261/eng-cs-1308389-eurostyle-terminal-blocks-0607-30261813.pdf?src-supplier=Onlinecomponents.com, ComponentLink7URL=https://datasheet.ciiva.com/30261/eng-cs-1308389-eurostyle-terminal-blocks-0607-30261813.pdf?src-supplier=Onlinecomponents.com, Connector System=5937ConnectorSystem, Connector Type=Receptacle, Contact Material=Brass, Contact Plating=Tin, Current Rating=13.5A, Depth=8.2mm, Designed by="Aslı Kurt", ELV=Compliant, Housing Color=Green, Housing Material=Polyamide, Lead Free="Lead Free", Length=10.6mm, Manufacturer Part Number=282836-2, Max Current Rating=13.5A, Max Voltage Rating (AC)=300V, Mount="Through Hole", Number of Circuits=2, Number of Contacts=2, Number of Levels=1, Number of Poles=2, Number of Positions=2, Number of Positions Per Level=2, Number of Rows=1, Operating Supply Voltage=300V, Orientation=Straight, Packaging=Tray, Pitch=5mm, Plating=Brass, Pricing 1="1=0,6, 10=0,578, 25=0,576, 50=0,5566, 100=0,4666, 300=0,43743, 600=0,41315, 1200=0,36211, 5100=0,31593 (USD)", Radiation Hardening=No, Reach SVHC Compliant=Unknown, RoHS=Yes, RoHS Compliant=Yes, Screw Flange="No (Without)", Screwless Terminal Block="No (Without)", Series=Buchanan, Side Stackable="Yes (With)", Stock 1=33835, Supplier 1=Digikey, Tail Length=3.5mm, Termination=Solder, Thread Size=M3, Voltage=300V, Voltage Rating=300V, Width=10mm, Wire Gauge (Max)=30AWG, Wire Gauge (Min)=30AWG, Wire/Cable Gauge=30AWG, Insulation Material=Nylon, Interlock="Yes (With)"
R1 R4 R5 R6 R7 R8: library part "RES 470 OHM 0805", "RES 470 OHM 1% 1/8W 0805", Case Code (Metric)=2012, Case Code (Imperial)=0805, Manufacturer=Yageo, Max Operating Temperature=155°C, Max Power Dissipation=125mW, Min Operating Temperature=-55°C, Package Quantity=5000, Resistance=470R, Resistance Tolerance=1%, Resistor Type="Thick Film", Supplier Part Number 1=311-470CRCT-ND, Temperature Coefficient=100ppm/°C, Voltage Rating=150V, Case/Package=0805, Category="Chip SMD Resistors", ComponentLink1Description=https://datasheet.ciiva.com/46447/444164-46447580.pdf?src-supplier=Element14, ComponentLink1URL=https://datasheet.ciiva.com/46447/444164-46447580.pdf?src-supplier=Element14, ComponentLink2Description=https://datasheet.ciiva.com/2457/pyu-r-int-thick-7-2457057.pdf?src-supplier=Digikey, ComponentLink2URL=https://datasheet.ciiva.com/2457/pyu-r-int-thick-7-2457057.pdf?src-supplier=Digikey, ComponentLink3Description=https://datasheet.ciiva.com/2457/pyu-r-int-thick-7-2457058.pdf?src-supplier=Digikey, ComponentLink3URL=https://datasheet.ciiva.com/2457/pyu-r-int-thick-7-2457058.pdf?src-supplier=Digikey, ComponentLink4Description=https://datasheet.ciiva.com/2457/pyu-r-int-thick-7-2457056.pdf?src-supplier=Digikey, ComponentLink4URL=https://datasheet.ciiva.com/2457/pyu-r-int-thick-7-2457056.pdf?src-supplier=Digikey, ComponentLink5Description=https://datasheet.ciiva.com/7941/444164-7941798.pdf?src-supplier=Element14, ComponentLink5URL=https://datasheet.ciiva.com/7941/444164-7941798.pdf?src-supplier=Element14, ComponentLink6Description=https://datasheet.ciiva.com/7941/444164-7941797.pdf?src-supplier=Element14, ComponentLink6URL=https://datasheet.ciiva.com/7941/444164-7941797.pdf?src-supplier=Element14, ComponentLink7Description=https://datasheet.ciiva.com/16745/rc0805-16745229.pdf?src-supplier=Future+Electronics, ComponentLink7URL=https://datasheet.ciiva.com/16745/rc0805-16745229.pdf?src-supplier=Future+Electronics, Construction=Rectangular, Depth=1.25mm, Designed by="Aslı Kurt", Features="Moisture Resistant", Height=0.5mm, Lead Free="Lead Free", Lead Pitch=0.4mm, Length=2mm, Manufacturer Part Number=RC0805FR-07470RL, Number of Pins=2, Number of Terminations=2, Packaging="Tape and Reel", Power Rating=125mW, Pricing 1="1=0,1, 10=0,025, 50=0,016, 100=0,0133, 500=0,00912, 1000=0,00787 (USD)", Reach SVHC Compliant=Unknown, RoHS=Yes, RoHS Compliant=Yes, Series=RC, Size Code=0805, Stock 1=416993, Supplier 1=Digikey, Termination=SMD/SMT, Tolerance=1%, Voltage Rating (AC)=150V, Voltage Rating (DC)=150V, Width=1.25mm
R2 R3 R11: library part "RES 10K OHM 0805", "RES 10K OHM 5% 1/8W 0805", Case Code (Metric)=2012, Case Code (Imperial)=0805, Manufacturer=Yageo, Max Operating Temperature=155°C, Max Power Dissipation=125mW, Min Operating Temperature=-55°C, Resistance=10kR, Resistance Tolerance=5%, Resistor Type="Thick Film", Supplier Part Number 1=311-10KARCT-ND, Temperature Coefficient=100ppm/°C, Voltage Rating=150V, Case/Package=0805, Category="Chip SMD Resistors", ComponentLink1Description=https://datasheet.ciiva.com/7983/444164-7983765.pdf?src-supplier=Element14, ComponentLink1URL=https://datasheet.ciiva.com/7983/444164-7983765.pdf?src-supplier=Element14, ComponentLink2Description=https://datasheet.ciiva.com/7941/444164-7941870.pdf?src-supplier=Element14, ComponentLink2URL=https://datasheet.ciiva.com/7941/444164-7941870.pdf?src-supplier=Element14, ComponentLink3Description=https://datasheet.ciiva.com/7941/444164-7941871.pdf?src-supplier=Element14, ComponentLink3URL=https://datasheet.ciiva.com/7941/444164-7941871.pdf?src-supplier=Element14, Construction=Rectangular, Contact Plating=Tin,Matte, Depth=1.25mm, Designed by="Aslı Kurt", Features="Moisture Resistant", Height=0.5mm, Lead Free=5697LeadFree, Length=2mm, Manufacturer Part Number=RC0805JR-0710KL, Military Standard=Not, Number of Terminations=2, Packaging="Tape and Reel", Power Rating=125mW, Pricing 1="1=0,1, 10=0,023, 50=0,0144, 100=0,012, 500=0,00818, 1000=0,00706 (USD)", Radiation Hardening=No, Reach SVHC Compliant=Unknown, RoHS=Yes, RoHS Compliant=Yes, Series=RC, Size Code=0805, Stock 1=444162, Supplier 1=Digikey, Termination=SMD/SMT, Tolerance=5%, Width=1.25mm
R9 R10: library part "RES 4K7 OHM 0603", "RES 4K7 %5 OHM 0603 SMD", Case Code (Metric)=1608, Case Code (Imperial)=0603, Manufacturer=Yageo, Max Operating Temperature=155°C, Max Power Dissipation=100mW, Min Operating Temperature=-55°C, Resistance=4.7kR, Resistance Tolerance=5%, Resistor Type="Thick Film", Supplier Part Number 1=311-4.7KGRCT-ND, Temperature Coefficient=100ppm/°C, Voltage Rating=50V, Case/Package=0603, Category="Chip SMD Resistors", ComponentLink1Description=https://datasheet.ciiva.com/46412/443971-46412858.pdf?src-supplier=Element14, ComponentLink1URL=https://datasheet.ciiva.com/46412/443971-46412858.pdf?src-supplier=Element14, Construction=Rectangular, Depth=0.8mm, Designed by="Aslı Kurt", Features="Moisture Resistant", Lead Free="Lead Free", Length=1.6mm, Manufacturer Part Number=RC0603JR-074K7L, Military Standard=Not, Number of Pins=2, Number of Terminations=2, Packaging="Tape and Reel", Power Rating=100mW, Pricing 1="1=0,10000, 10=0,01900, 100=0,00770, 1000=0,00344, 2500=0,00298 (USD)", REACH SVHC="No SVHC", RoHS=Yes, RoHS Compliant=Yes, Series=RC, Size Code=0603, Stock 1=3901839, Supplier 1=Digi-Key, Termination=SMD/SMT, Tolerance=5%, Voltage Rating (DC)=50V, Width=0.8mm
R12: library part "RES 10m OHM 1206", "Res Thick Film 1206 0.01 Ohm 1% 0.25W(1/4W) ±1500ppm/C Pad SMD Automotive T/R", Manufacturer=Yageo, Resistance=10mR, Supplier Part Number 1=311-0.01LWCT-ND, Category="Chip SMD Resistors", ComponentLink1Description=https://datasheet.ciiva.com/5557/pyu-rl-hp-521-rohs-l-2-5557947.pdf?src-supplier=Mouser, ComponentLink1URL=https://datasheet.ciiva.com/5557/pyu-rl-hp-521-rohs-l-2-5557947.pdf?src-supplier=Mouser, Designed by="Aslı Kurt", Manufacturer Part Number=RL1206FR-070R01L, Pricing 1="1=0,76, 10=0,403, 50=0,2764, 100=0,238, 500=0,1747, 1000=0,15476 (USD)", RoHS=Yes, Stock 1=37595, Supplier 1=Digikey
R13: library part "CAP CER 470pF 0805", "CAP CER 470PF 50V X7R 0805", Capacitance=470pF, Dielectric Material=4241ConductorMaterial, Manufacturer=Yageo, Supplier Part Number 1=311-1124-1-ND, Voltage Rating (AC)=50V, Category="Ceramic Capacitors", ComponentLink1Description=https://datasheet.ciiva.com/29148/445173-da-01-en-kerko-chip-0805-x7r-470pf-10proz-50vg-29148961.pdf?src-supplier=Conrad, ComponentLink1URL=https://datasheet.ciiva.com/29148/445173-da-01-en-kerko-chip-0805-x7r-470pf-10proz-50vg-29148961.pdf?src-supplier=Conrad, ComponentLink2Description=https://datasheet.ciiva.com/46396/1489800-46396332.pdf?src-supplier=Element14, ComponentLink2URL=https://datasheet.ciiva.com/46396/1489800-46396332.pdf?src-supplier=Element14, ComponentLink3Description=https://datasheet.ciiva.com/15189/getdatasheetpartid-299872-15189229.pdf?src-supplier=Verical, ComponentLink3URL=https://datasheet.ciiva.com/15189/getdatasheetpartid-299872-15189229.pdf?src-supplier=Verical, ComponentLink4Description=https://datasheet.ciiva.com/144/mlccorderingcode-144598.pdf?src-supplier=Digikey, ComponentLink4URL=https://datasheet.ciiva.com/144/mlccorderingcode-144598.pdf?src-supplier=Digikey, ComponentLink5Description=https://datasheet.ciiva.com/144/mlccorderingcode-144599.pdf?src-supplier=Digikey, ComponentLink5URL=https://datasheet.ciiva.com/144/mlccorderingcode-144599.pdf?src-supplier=Digikey, ComponentLink6Description=https://datasheet.ciiva.com/144/mlccorderingcode-144600.pdf?src-supplier=Digikey, ComponentLink6URL=https://datasheet.ciiva.com/144/mlccorderingcode-144600.pdf?src-supplier=Digikey, Designed by="Aslı Kurt", Halogen Free=5694HalogenFree, Lead Free=5697LeadFree, Manufacturer Part Number=CC0805KRX7R9BB471, Pricing 1="1=0,1, 10=0,067, 50=0,0398, 100=0,0314, 500=0,02316, 1000=0,01918 (USD)", RoHS=Yes, Stock 1=102398, Supplier 1=Digikey
SW1 SW2: library part "4.2mm x 3.2mm BUTTON", "Microminiature Top Actuated Tactile Switch Momentary SPST-NO 50mA 12VDC Surface Mount T/R", Contact Resistance=100mR, Manufacturer="ITT C&K", Manufacturer Part Number=PTS815SJK250SMTRLFS, Supplier Part Number 1=CKN12216-1-ND, Category="Tactile Switches", ComponentLink1Description=http://datasheet.octopart.com/PTS815SJK250SMTRLFS-C%26K-Components-datasheet-130077068.pdf?src-supplier=Mouser, ComponentLink1URL=http://datasheet.octopart.com/PTS815SJK250SMTRLFS-C%26K-Components-datasheet-130077068.pdf?src-supplier=Mouser, ComponentLink2Description=http://datasheet.octopart.com/PTS815SJK250SMTRLFS-C%26K-Components-datasheet-130077068.pdf?src-supplier=Newark, ComponentLink2URL=http://datasheet.octopart.com/PTS815SJK250SMTRLFS-C%26K-Components-datasheet-130077068.pdf?src-supplier=Newark, ComponentLink3Description=http://datasheet.octopart.com/PTS815SJK250SMTRLFS-C%26K-Components-datasheet-130077068.pdf?src-supplier=Allied+Electronics, ComponentLink3URL=http://datasheet.octopart.com/PTS815SJK250SMTRLFS-C%26K-Components-datasheet-130077068.pdf?src-supplier=Allied+Electronics, ComponentLink4Description=http://datasheet.octopart.com/PTS815SJK250SMTRLFS-C%26K-Components-datasheet-130077068.pdf?src-supplier=Onlinecomponents.com, ComponentLink4URL=http://datasheet.octopart.com/PTS815SJK250SMTRLFS-C%26K-Components-datasheet-130077068.pdf?src-supplier=Onlinecomponents.com, ComponentLink5Description=http://datasheet.octopart.com/PTS815SJK250SMTRLFS-C%26K-Components-datasheet-130077068.pdf?src-supplier=Verical, ComponentLink5URL=http://datasheet.octopart.com/PTS815SJK250SMTRLFS-C%26K-Components-datasheet-130077068.pdf?src-supplier=Verical, ComponentLink6Description=http://datasheet.octopart.com/PTS815SJK250SMTRLFS-C%26K-Components-datasheet-130077068.pdf?src-supplier=Future+Electronics, ComponentLink6URL=http://datasheet.octopart.com/PTS815SJK250SMTRLFS-C%26K-Components-datasheet-130077068.pdf?src-supplier=Future+Electronics, ComponentLink7Description=http://datasheet.octopart.com/PTS815SJK250SMTRLFS-C%26K-Components-datasheet-130077068.pdf?src-supplier=Digikey, ComponentLink7URL=http://datasheet.octopart.com/PTS815SJK250SMTRLFS-C%26K-Components-datasheet-130077068.pdf?src-supplier=Digikey, ComponentLink8Description=http://datasheet.octopart.com/PTS815SJK250SMTRLFS-C%26K-Components-datasheet-130077068.pdf?src-supplier=Avnet, ComponentLink8URL=http://datasheet.octopart.com/PTS815SJK250SMTRLFS-C%26K-Components-datasheet-130077068.pdf?src-supplier=Avnet, ComponentLink9Description=http://datasheet.octopart.com/PTS815SJK250SMTRLFS-C%26K-Components-datasheet-130077068.pdf?src-supplier=Sager+Electronics, ComponentLink9URL=http://datasheet.octopart.com/PTS815SJK250SMTRLFS-C%26K-Components-datasheet-130077068.pdf?src-supplier=Sager+Electronics, ComponentLink10Description=http://datasheet.octopart.com/PTS815SJK250SMTRLFS-C%26K-Components-datasheet-130077068.pdf?src-supplier=NAC+Semi, ComponentLink10URL=http://datasheet.octopart.com/PTS815SJK250SMTRLFS-C%26K-Components-datasheet-130077068.pdf?src-supplier=NAC+Semi, ComponentLink11Description=http://datasheet.octopart.com/PTS815SJK250SMTRLFS-C%26K-Components-datasheet-130077068.pdf?src-supplier=LCSC, ComponentLink11URL=http://datasheet.octopart.com/PTS815SJK250SMTRLFS-C%26K-Components-datasheet-130077068.pdf?src-supplier=LCSC, ComponentLink12Description=http://datasheet.octopart.com/PTS815SJK250SMTRLFS-C%26K-Components-datasheet-130077068.pdf?src-supplier=Electro+Sonic, ComponentLink12URL=http://datasheet.octopart.com/PTS815SJK250SMTRLFS-C%26K-Components-datasheet-130077068.pdf?src-supplier=Electro+Sonic, ComponentLink13Description=http://datasheet.octopart.com/PTS815SJK250SMTRLFS-C%26K-Components-datasheet-130077068.pdf?src-supplier=TTI, ComponentLink13URL=http://datasheet.octopart.com/PTS815SJK250SMTRLFS-C%26K-Components-datasheet-130077068.pdf?src-supplier=TTI, ComponentLink14Description=https://datasheet.octopart.com/PTS815SJK250SMTRLFS-C%26K-Components-datasheet-166147782.pdf?src-supplier=TME, ComponentLink14URL=https://datasheet.octopart.com/PTS815SJK250SMTRLFS-C%26K-Components-datasheet-166147782.pdf?src-supplier=TME, Designed by="Aslı Kurt", Number of Positions=2NUMBER, Pricing 1="1=0,22, 10=0,208, 25=0,1972, 100=0,1786, 250=0,1628, 500=0,1513, 1000=0,12908 (USD)", RoHS=Yes, Stock 1=21205, Supplier 1=Digikey
U1: "Analog Devices - ADXL345BCCZ - Mems Accelerometer, 3-AXIS, Digital, X, Y, Z, ± 2G, ± 4G, ± 8G, ± 16G, 2 V, 3.6 V, LGA", Case/Package=LGA, Manufacturer="Analog Devices", Max Operating Temperature=85°C, Max Supply Voltage=3.6V, Min Operating Temperature=-40°C, Min Supply Voltage=2V, Nominal Supply Current=140uA, Operating Supply Current=145uA, Package Quantity=490, Supplier Part Number 1=505-ADXL345BCCZ-ND, -3db Bandwidth=1.6kHz, Axis="X, Y, Z", Bandwidth=0.05Hz, Category=Accelerometers, ComponentLink1Description=https://datasheet.ciiva.com/5786/adxl345-5786432.pdf?src-supplier=Farnell, ComponentLink1URL=https://datasheet.ciiva.com/5786/adxl345-5786432.pdf?src-supplier=Farnell, ComponentLink2Description=https://datasheet.ciiva.com/15099/getdatasheetpartid-112906-15099657.pdf?src-supplier=Verical, ComponentLink2URL=https://datasheet.ciiva.com/15099/getdatasheetpartid-112906-15099657.pdf?src-supplier=Verical, ComponentLink3Description=https://datasheet.ciiva.com/1577/adxl345-1577555.pdf?src-supplier=Farnell, ComponentLink3URL=https://datasheet.ciiva.com/1577/adxl345-1577555.pdf?src-supplier=Farnell, ComponentLink4Description=https://datasheet.ciiva.com/1165/1793774-1165508.pdf?src-supplier=Element14, ComponentLink4URL=https://datasheet.ciiva.com/1165/1793774-1165508.pdf?src-supplier=Element14, ComponentLink5Description=https://datasheet.ciiva.com/1165/1793774-1165507.pdf?src-supplier=Element14, ComponentLink5URL=https://datasheet.ciiva.com/1165/1793774-1165507.pdf?src-supplier=Element14, ComponentLink6Description=https://datasheet.ciiva.com/3271/adxl345-ep-3271527.pdf?src-supplier=Avnet, ComponentLink6URL=https://datasheet.ciiva.com/3271/adxl345-ep-3271527.pdf?src-supplier=Avnet, ComponentLink7Description=https://datasheet.ciiva.com/2809/adxl345-2809950.pdf?src-supplier=Digikey, ComponentLink7URL=https://datasheet.ciiva.com/2809/adxl345-2809950.pdf?src-supplier=Digikey, Contact Plating=Gold, Depth=3mm, Designed by="Aslı Kurt", Height=0.98mm, Lead Free="Contains Lead", Length=5mm, Manufacturer Part Number=ADXL345BCCZ, Number of Pins=14, Output Type=Digital, Packaging=Tray, Pricing 1="1=8,76, 5=7,384, 10=6,862, 25=6,2276, 40=5,9255, 157=5,12803, 471=4,56628, 1099=4,17569 (USD)", Radiation Hardening=No, Reach SVHC Compliant=No, RoHS=Yes, RoHS Compliant=Yes, Sensitivity=282mV/g, Series=-, Stock 1=26255, Supplier 1=Digikey, Supply Current=140uA, Width=3mm
U2: "Ms-System Monitor/Other I2c Temperature, Voltage And Current Monitor", Case/Package=MSOP, Manufacturer="Analog Devices / Linear Technology", Max Operating Temperature=85°C, Min Operating Temperature=-40°C, Package Quantity=2500, Supplier Part Number 1=505-LTC2990IMS#TRPBFCT-ND, Category="Amplifiers - Op Amps, Buffer, Instrumentation", ComponentLink1Description=https://datasheet.ciiva.com/2003/29813-2003915.pdf?src-supplier=Digikey, ComponentLink1URL=https://datasheet.ciiva.com/2003/29813-2003915.pdf?src-supplier=Digikey, Designed by="Aslı Kurt", Height=0.86mm, Length=3mm, Manufacturer Part Number=LTC2990IMS#TRPBF, Number of Pins=10, Output Type=I2C, Packaging="Tape and Reel", Pricing 1="1=9,28, 10=6,417, 25=5,6784, 100=4,8527, 250=4,45248, 500=4,2087, 1000=4,00633 (USD)", RoHS=Yes, RoHS Compliant=Yes, Stock 1=9119, Supplier 1=Digikey

## Free pads (board coordinates)
  round 0 hole 3.3 mask+0.05: 2(2.47,2.54) 2(54.54,7.62) 2(54.54,35.56)
  round 3.3 hole 3.3 mask+0.05: ""(3.74,50.8)

## Via types
v1: diameter 0.45, hole 0.3, Top Layer to Bottom Layer, tented both sides, 51 vias
v2: diameter 0.508, hole 0.254, Top Layer to Bottom Layer, tented both sides, 6 vias

## Nets (pads, with @x,y where several pads share a name; then routed paths per layer and width w, separated by ;. In a path a pad name is that pad's centre, name@x,y a point inside that pad or via, vN(x,y) a via of type N, cw(c..) or ccw(c..) an arc to the next point about the centre after c; other vN are vias at no path point)
3V3: C1.2 C2.2 C3.1 C4.2 C5.2 C6.2 D1.2 J1.2 J1.4 J5.3 R3.2 R9.2 R10.2 SW1.4 U1.1 U1.6 U2.10
  other v1: 20.875,25.35 29.5,25.5 28,26 31,26 29.5,26.5 19.6,26.7 20.5,32.5 19.5,33 19.5,34 20.5,34
  other v2: 32.9,11.517 34,11.517 32.9,12.56
5V: J1.5
AVDD: J2.3
GND: C1.1 C2.1 C3.2 C4.1 C5.1 C6.1 J1.6 J1.7 J2.4 J5.4 R2.1 R4.1 R5.1 R6.1 R7.1 R8.1 R11.1 SW2.4 U1.2 U1.4 U1.5 U2.5 U2.8 U2.9
  other v1: 23.5,33.463 23.5,35 23.5,36.537 49.5,38.5 47,39.5 52,39.5 49.5,40.5 47,41.5 52,41.5 49.5,42.5 47,43.5 52,43.5 49.5,44.5 47,45.5 52,45.5
NetD1_1: D1.1 R4.2 | length 1.7
  Top Layer w0.508: R4.2 D1.1
NetD2_1: D2.1 R5.2 | length 1.6
  Top Layer w0.381: R5.2 D2.1
NetD3_1: D3.1 R6.2 | length 1.6
  Top Layer w0.381: R6.2 D3.1
NetD4_1: D4.1 R7.2 | length 1.7
  Top Layer w0.381: D4.1 R7.2
NetD5_1: D5.1 R8.2 | length 1.5
  Top Layer w0.381: D5.1 R8.2
NetR1_1: R1.1 SW1.1 | length 1.3
  Top Layer w0.635: SW1.1 10.678,34.659 10.71,34.627 10.71,33.483 10.743,33.45 R1.1
NetR2_2: R2.2 SW1.2 | length 1.5
  Top Layer w0.635: SW1.2 6.671,33.283 6.703,33.25 R2.2
NetR3_1: R3.1 SW2.2 | length 1.5
  Top Layer w0.635: SW2.2 6.671,16.983 6.703,16.95 R3.1
NetR11_2: R11.2 U1.12 | length 2.9
  Top Layer w0.508: v2(23.8,29.5) 23.804,29.496 23.804,28.027 U1.12
  Bottom Layer w0.508: v2(23.8,29.5) R11.2
NRST: J1.3 SW2.1 | length 20.2
  Top Layer w0.508: SW2.1@11,18.425 12.225,17.2 21.52,7.905 J1.3
PA0: J3.1
PA1: J3.2 R1.2 | length 45.9
  Top Layer w0.381: R1.2 10.75,26.75 32,5.5 38.88,5.5 J3.2
PA2/TX: J4.7
PA3/RX: J4.8
PA4: J3.3
PA5/SCK: J2.5
PA6/MISO: J2.6
PA7/MOSI: J2.7
PA8/CS: J4.1
PA9: J2.10
PA10: J4.6
PB0: J3.4
PB3: D2.2 J4.5 | length 23.2
  Top Layer w0.508: J4.5 44.577,50.603 44.577,27.959 44.673,27.863 D2.2
PB4: D3.2 J4.3 | length 19.2
  Top Layer w0.508: D3.2 38.65,32.338 38.746,32.434 39.002,32.434 39.3,32.732 J4.3
PB5: D4.2 J4.4 | length 30.3
  Top Layer w0.508: D4.2 41.538,21.638 41.836,21.936 J4.4@41.836,50.796
PB6: D5.2 J2.8 | length 26.8
  Top Layer w0.508: J2.8 34.5,41.376 D5.2
PB8/SCL: J2.1 J5.2 R10.1 U1.14 U2.7 | length 113.8
  Top Layer w0.254: v1(7.1,43.2) 7.8,42.5 27.7,42.5 32.2,38 32.2,14.5 33.325,13.375 U2.7
  Top Layer w0.508: v1(7.1,43.2) 7.1,50.604 J2.1 ; v1(21.441,26.925) U1.14
  Bottom Layer w0.508: v1(7.1,43.2) 7.1,38.723 17.675,28.148 19.652,28.148 R10.1 ; J2.1 21.441,36.655 v1(21.441,26.925)
PB9/SDA: J2.2 J5.1 R9.1 U1.13 U2.6 | length 103.9
  Top Layer w0.254: v1(10.1,43.9) 10.6,43.4 27.7,43.4 32.7,38.4 32.7,15.125 33.924,13.901 34.374,13.901 U2.6